# Altium PCB RS2332 2 кан..PcbDoc
Units mil, origin at the board's own origin, x right, y up, seen from the top; angles counter-clockwise.
Board outline not stored, 4 copper layers (Top Layer, Internal Plane 1, Internal Plane 2, Bottom Layer); 11 components, 0 nets, 52 pads, 10 vias.
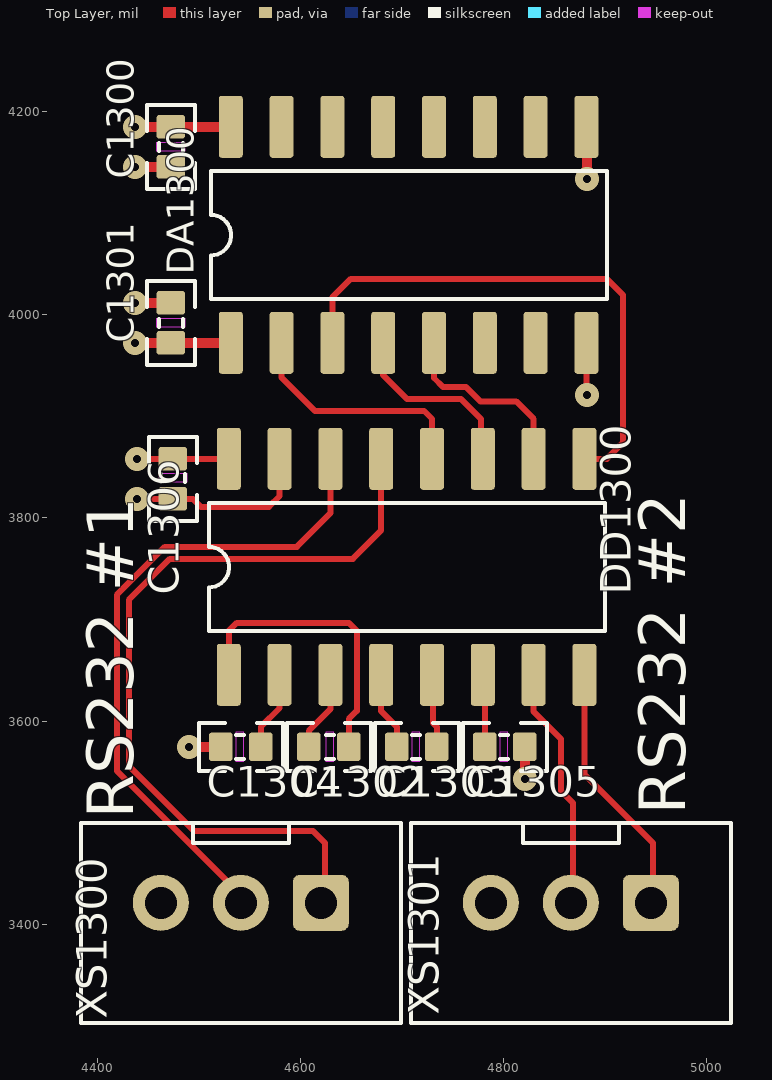
[diagram p0: Top Layer view]
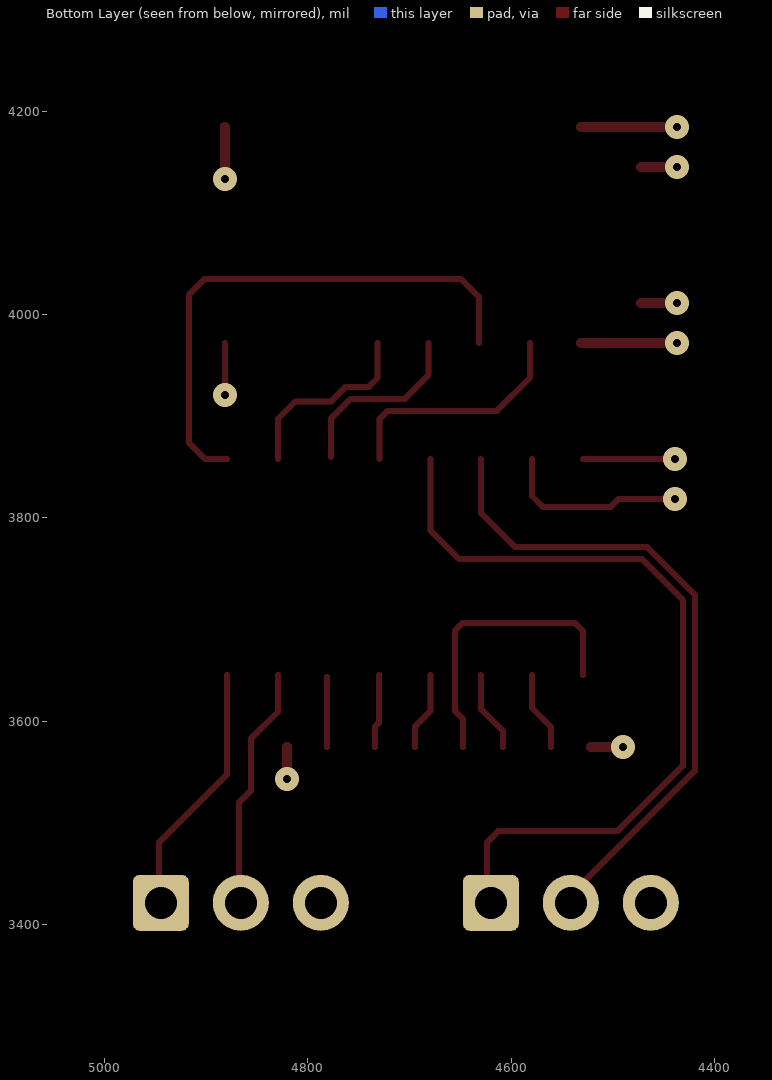
[diagram p1: Bottom Layer view, seen from below]
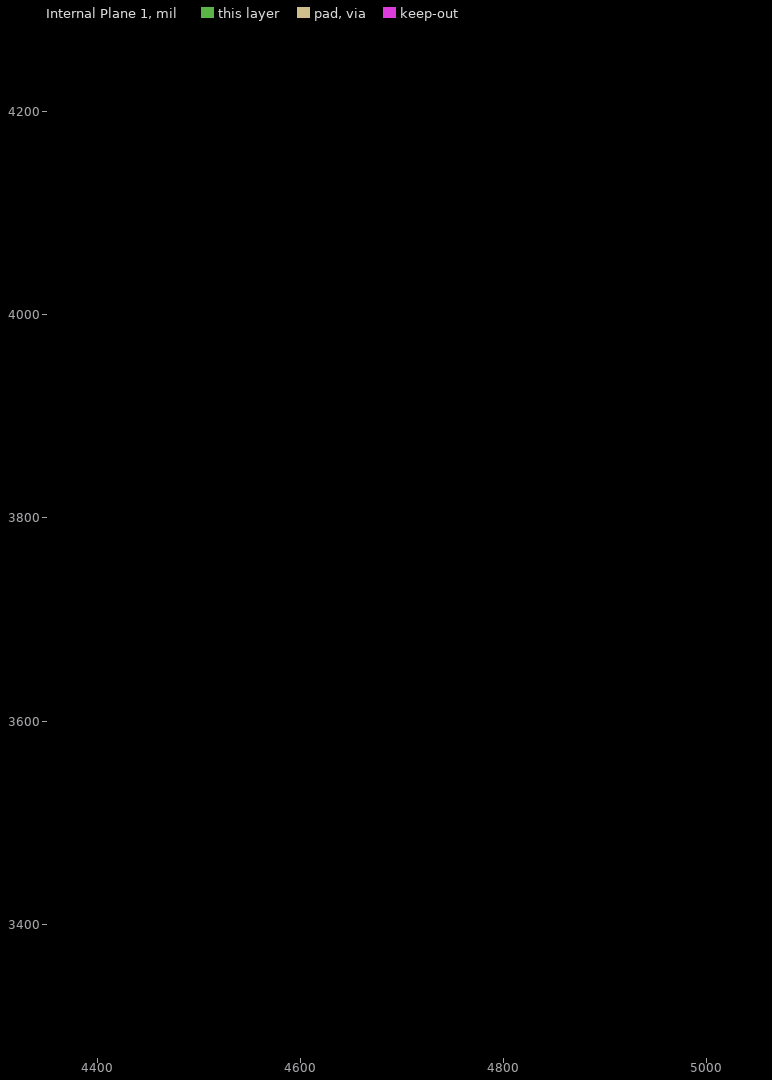
[diagram p2: Internal Plane 1, clearances drawn from the general rule]
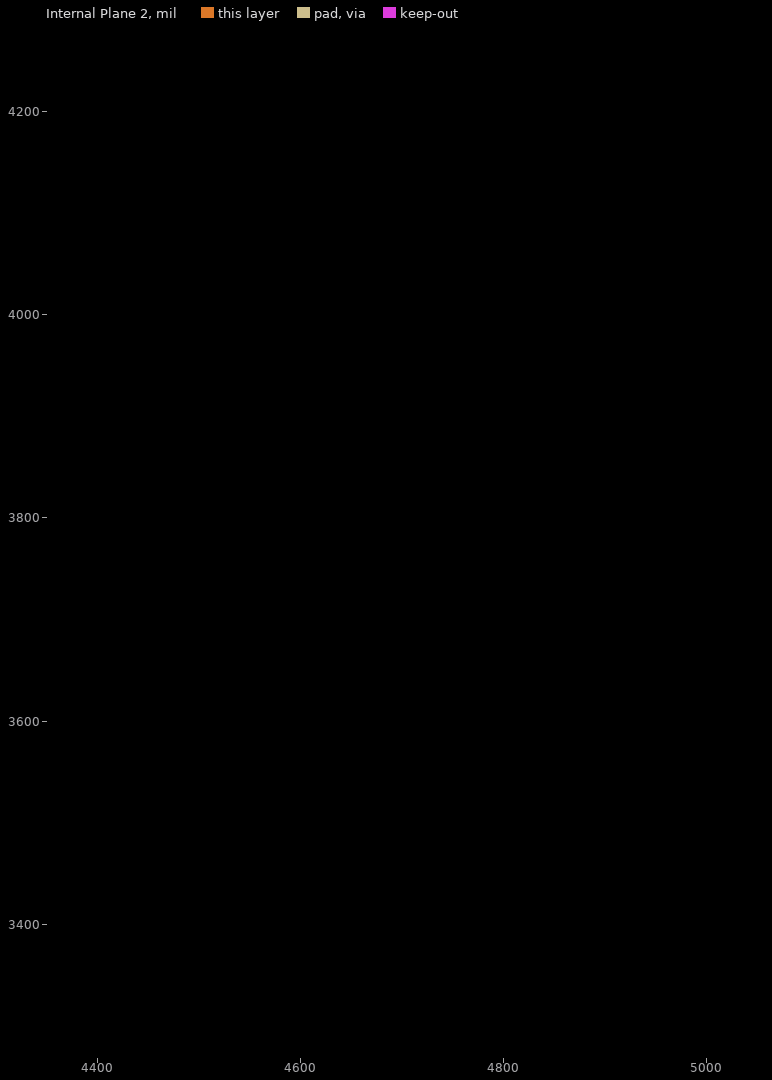
[diagram p3: Internal Plane 2, clearances drawn from the general rule]

## Layer stack, top to bottom
Top Solder: solder mask 0.4, Solder Resist, Dk 3.5
Top Layer: signal copper 1.4
Dielectric 1: dielectric 12.6, FR-4, Dk 4.8
Internal Plane 1: plane copper 1.4
Dielectric2: dielectric 12.6, FR-4, Dk 4.8
Internal Plane 2: plane copper 1.4
Dielectric3: dielectric 12.6, FR-4, Dk 4.8
Bottom Layer: signal copper 1.4
Bottom Solder: solder mask 0.4, Solder Resist, Dk 3.5

## Design rules (kind name [scope] priority, off if disabled: settings)
RoomDefinition RS232 [InComponentClass('Components Class 1')] p1: confinementstyle=ConfineIn formatcopy=TRUE lockcomponents=FALSE outline 4370.08,3307.09 5039.37,3307.09 5039.37,4291.34 4370.08,4291.34

## Components (designator, comment, footprint, x,y, rotation, side; value= is the part's Value field where it differs from the comment)
C1300 "0,1" CAP0402#1 4472.44,4165.35 r270 top
C1301 "0,1" CAP0402#1 4472.44,3992.13 r90 top
C1302 "0,1" CAP0402#2 4647.64,3574.8 r180 top
C1303 "0,47" CAP0402#2 4694.88,3574.8 r0 top
C1304 "0,47" CAP0402#2 4521.65,3574.8 r0 top
C1305 "0,47" CAP0402#2 4781.5,3574.8 r0 top
C1306 "0,1" CAP0402#2 4474.41,3858.27 r270 top
DA1300 "MAX14850" SO16 4531.5,3976.38 r90 top
DD1300 "MAX3232" SO16-3.9 4529.53,3649.61 r90 top
XS1300 "RS232 #1" MW-3M 4620.08,3421.26 r180 top
XS1301 "RS232 #2" MW-3M 4944.88,3421.26 r180 top (schematic designator XS9)

## Footprints (in the part's own frame and the unit in brackets; to place one, negate y for a bottom-side part, rotate by r counter-clockwise, add the part's x,y. Pads: shape width x height; smd on the part's side, far side on the other; paste and mask are expansions set on the pad)
CAP0402#1 [mm]
  rrect25% 0.59x0.72 smd: 1(-0.5,0) 2(0.5,0)
  Top Layer keep-out region: -0.1,0.36 -0.1,-0.36 0.1,-0.36 0.1,0.36
  silkscreen extent -1.05,-0.6 1.05,0.6, body extent -0.5,-0.25 0.5,0.25, height 0.49
CAP0402#2 [mm]
  rrect25% 0.59x0.72 smd: 1(0,0) 2(1,0)
  Top Layer keep-out region: 0.375,0.36 0.375,-0.36 0.575,-0.36 0.575,0.36
  silkscreen extent -0.55,-0.6 1.55,0.6, body extent 0,-0.25 1,0.25, height 0.49
MW-3M [mm]
  rrect25% 1.4x1.4 hole 0.8: 1(0,0)
  round 1.4 hole 0.8: 2(2,0) 3(4,0)
  silkscreen extent -2,-2 6,3, body extent -2,-2 6,3, height 6
SO16 [mm]
  rrect25% 1.55x0.6 smd: 1(-0.1,0) 2(-0.1,-1.27) 3(-0.1,-2.54) 4(-0.1,-3.81) 5(-0.1,-5.08) 6(-0.1,-6.35) 7(-0.1,-7.62) 8(-0.1,-8.89) 9(5.3,-8.89) 10(5.3,-7.62) 11(5.3,-6.35) 12(5.3,-5.08) 13(5.3,-3.81) 14(5.3,-2.54) 15(5.3,-1.27) 16(5.3,0)
  silkscreen extent 1,-9.4 4.2,0.5, body extent -0.53,-9.45 5.67,0.55, height 1.7
SO16-3.9 [mm]
  rrect25% 1.55x0.6 smd: 1(-0.1,0) 2(-0.1,-1.27) 3(-0.1,-2.54) 4(-0.1,-3.81) 5(-0.1,-5.08) 6(-0.1,-6.35) 7(-0.1,-7.62) 8(-0.1,-8.89) 9(5.3,-8.89) 10(5.3,-7.62) 11(5.3,-6.35) 12(5.3,-5.08) 13(5.3,-3.81) 14(5.3,-2.54) 15(5.3,-1.27) 16(5.3,0)
  silkscreen extent 1,-9.4 4.2,0.5, body extent -0.53,-9.45 5.67,0.55, height 1.7

## Part data
C1300 C1301 C1302 C1303 C1304 C1305 C1306: library part CAP_0402, "Конденсатор чип"
DA1300: "Цифровой изолятор 2 вх 2 вых 2 вх/вых"
DD1300: "Интерфейс RS232 2 кан."
XS1300 XS1301: library part Разъем3_1, "Разъем"

## Via types
v1: diameter 23.62, hole 7.87, Top Layer to Bottom Layer, tented both sides, 10 vias

## Nets (pads, with @x,y where several pads share a name; then routed paths per layer and width w, separated by ;. In a path a pad name is that pad's centre, name@x,y a point inside that pad or via, vN(x,y) a via of type N, cw(c..) or ccw(c..) an arc to the next point about the centre after c; other vN are vias at no path point)
pads on no net: C1300.1 C1300.2 C1301.1 C1301.2 C1302.1 C1302.2 C1303.1 C1303.2 C1304.1 C1304.2 C1305.1 C1305.2 C1306.1 C1306.2 DA1300.1 DA1300.2 DA1300.3 DA1300.4 DA1300.5 DA1300.6 DA1300.7 DA1300.8 DA1300.9 DA1300.10 DA1300.11 DA1300.12 DA1300.13 DA1300.14 DA1300.15 DA1300.16 DD1300.1 DD1300.2 DD1300.3 DD1300.4 DD1300.5 DD1300.6 DD1300.7 DD1300.8 DD1300.9 DD1300.10 DD1300.11 DD1300.12 DD1300.13 DD1300.14 DD1300.15 DD1300.16 XS1300.1 XS1300.2 XS1300.3 XS1301.1 XS1301.2 XS1301.3
copper on no net: | length 4439.6
  Top Layer w5.91: v1(4438.98,3818.9) 4474.41,3818.9 4494.09,3818.9 4501.97,3811.02 4568.9,3811.02 4579.53,3821.65 4579.53,3858.27 ; v1(4438.98,3858.27) 4474.41,3858.27 4529.53,3858.27 ; 4529.53,3645.67 4529.53,3688.98 4537.4,3696.85 4647.64,3696.85 4655.51,3688.98 4655.51,3610.24 4647.64,3602.36 4647.64,3574.8 ; 4545.28,3425.2 4419.29,3551.18 4419.29,3724.41 4466.54,3771.65 4596.46,3771.65 4629.53,3804.72 4629.53,3858.27 ; 4561.02,3574.8 4561.02,3594.49 4579.53,3612.99 4579.53,3645.67 ; 4581.5,3972.44 4581.5,3938.19 4614.17,3905.51 4721.65,3905.51 4729.53,3897.64 4729.53,3858.27 ; 4608.27,3574.8 4608.27,3590.55 4629.53,3611.81 4629.53,3645.67 ; 4624.02,3425.2 4624.02,3480.31 4612.2,3492.13 4495.05,3492.13 4431.1,3556.07 4431.1,3719.52 4471.43,3759.84 4651.57,3759.84 4679.53,3787.8 4679.53,3858.27 ; 4631.5,3972.44 4631.5,4017.32 4649.61,4035.43 4901.57,4035.43 4917.32,4019.68 4917.32,3874.02 4901.57,3858.27 4879.53,3858.27 ; 4679.53,3645.67 4679.53,3609.84 4694.88,3594.49 4694.88,3574.8 ; 4681.5,3972.44 4681.5,3940.55 4704.72,3917.32 4757.87,3917.32 4777.56,3897.64 4777.56,3860.24 ; 4729.53,3645.67 4730.31,3644.88 4730.31,3598.43 4734.25,3594.49 4734.25,3574.8 ; 4731.5,3972.44 4731.5,3937.8 4740.16,3929.13 4762.77,3929.13 4777.05,3914.85 4812.32,3914.85 4829.53,3897.64 4829.53,3858.27 ; 4781.5,3574.8 4781.5,3643.7 ; 4829.53,3645.67 4829.53,3609.45 4856.3,3582.68 4856.3,3531.5 4868.11,3519.69 4868.11,3425.2 ; 4879.53,3645.67 4879.53,3547.64 4946.85,3480.32 4946.85,3425.2 ; 4881.5,3972.44 4881.5,3921.65 v1(4881.89,3921.26)
  Top Layer w9.84: v1(4437.01,3972.44) 4472.44,3972.44 4531.5,3972.44 ; v1(4437.01,4011.81) 4472.44,4011.81 ; v1(4437.01,4145.67) 4472.44,4145.67 ; v1(4437.01,4185.04) 4531.5,4185.04 ; v1(4490.16,3574.8) 4521.65,3574.8 ; v1(4820.87,3543.31) 4820.87,3574.8 ; 4881.5,4185.04 4881.89,4184.65 v1(4881.89,4133.86)

## Other copper
Internal Plane 1 (plane layer: these items are gaps in the copper):
  lines w19.68: 4409.45,4055.12 5000,4055.12 ; 4409.45,4055.12 4409.45,3346.46 5000,3346.46 5000,4055.12 ; 4409.45,4055.12 4409.45,4251.97 5000,4251.97 5000,4055.12
Internal Plane 2 (plane layer: these items are gaps in the copper):
  lines w19.68: 4409.45,4055.12 5000,4055.12 ; 4409.45,4055.12 4409.45,3346.46 5000,3346.46 5000,4055.12 ; 4409.45,4055.12 4409.45,4251.97 5000,4251.97 5000,4055.12